# EAGLE board Laboratory 2_ Part 1 – Build a 4-bit Adder_Subtractor (EAGLE 7.6.0)

Size 56.82 x 53.33 mm. Coordinates in mm from the lower left corner, seen from the top.
Outline: 0,0 56.82,0 56.82,53.33 0,53.33 0,0
Copper layers (1*16): Top 0.035mm / dielectric 1.5mm / Bottom 0.035mm
Design rules "default": minimum track width 10mil, minimum drill 24mil, track to track 8mil, track to pad 8mil, pad to pad 8mil, via to via 8mil, smd to smd 8mil, copper to edge 40mil, drill to drill 8mil, minimum pad ring 10mil, minimum via ring 8mil, stop-mask expansion 4mil, vias tented up to drill 0mil, thermal gap 10mil

## Footprints (pad centres in the part's own frame; a part is rotated, then mirrored left to right if it is on the bottom)
LED5MM = drill 0.813 octagon: A -1.27,0; K 1.27,0
2P-2.54-65/35MIL = drill 0.889 pad 1.651 square: 1 0,1.27 | drill 0.889 pad 1.651: 2 0,-1.27
0207/10 = drill 0.813 octagon: 1 -5.08,0; 2 5.08,0
M251 = drill 0.813 long: 1 -2.54,0; 2 0,0; 3 2.54,0
DIL14 = drill 0.813 long: 1 -7.62,-3.81; 2 -5.08,-3.81; 3 -2.54,-3.81; 4 0,-3.81; 5 2.54,-3.81; 6 5.08,-3.81; 7 7.62,-3.81; 8 7.62,3.81; 9 5.08,3.81; 10 2.54,3.81; 11 0,3.81; 12 -2.54,3.81; 13 -5.08,3.81; 14 -7.62,3.81

## Placement (x,y rotation side)
D1  [LED5MM]  5,35.48 0 top
D2  [LED5MM]  5,48.18 0 top
D3  [LED5MM]  5,60.88 0 top  (outside the outline)
D4  [LED5MM]  5,73.58 0 top  (outside the outline)
D5  [LED5MM]  5,86.28 0 top  (outside the outline)
P1  5V  [2P-2.54-65/35MIL]  5,10.08 0 top
R1  330‎Ω  [0207/10]  5,213.28 0 top  (outside the outline)
R2  330‎Ω  [0207/10]  5,225.98 0 top  (outside the outline)
R3  330‎Ω  [0207/10]  5,238.68 0 top  (outside the outline)
R4  330‎Ω  [0207/10]  5,251.38 0 top  (outside the outline)
R5  330‎Ω  [0207/10]  5,264.08 0 top  (outside the outline)
S1  [M251]  5,98.98 0 top  (outside the outline)
S2  [M251]  5,111.68 0 top  (outside the outline)
S3  [M251]  5,124.38 0 top  (outside the outline)
S4  [M251]  5,137.08 0 top  (outside the outline)
S5  [M251]  5,149.78 0 top  (outside the outline)
S6  [M251]  5,162.48 0 top  (outside the outline)
S7  [M251]  5,175.18 0 top  (outside the outline)
S8  [M251]  5,187.88 0 top  (outside the outline)
S9  [M251]  5,200.58 0 top  (outside the outline)
U1  [DIL14]  5,22.78 0 top

## Library data of the parts
D1-D5 P1 R1-R5 S1-S9 U1 = AUTODESK_CIRCUITS_BREADBOARD

## Nets
N$1: P1.1 R1.1 R2.1 R3.1 R4.1 R5.1 S1.1 S2.1 S3.1 S4.1 S5.1 S6.1 S7.1 S8.1 S9.1 U1.7
N$2: U1.6
N$3: U1.8
N$4: U1.11
N$5: U1.3
N$6: P1.2 S1.3 S2.3 S3.3 S4.3 S5.3 S6.3 S7.3 S8.3 S9.3 U1.14
N$7: D2.A
N$8: D1.A
N$9: D3.A
N$10: D4.A
N$11: D5.A
N$12: D1.K R1.2
N$13: D2.K R2.2
N$14: D3.K R3.2
N$15: D4.K R4.2
N$16: D5.K R5.2
N$17: S5.2
N$18: S8.2 U1.10
N$19: S4.2 U1.2
N$20: S7.2
N$21: S6.2 U1.5
N$22: S9.2
N$23: S3.2
N$24: S2.2 U1.13
N$25: S1.2 U1.1 U1.4 U1.9 U1.12

## Tracks (layer width: path | path; a pad name or v marks a point on that pad's centre or on a via)
N$1  (15 unrouted)
N$6  (10 unrouted)
N$12  (1 unrouted)
N$13  (1 unrouted)
N$14  (1 unrouted)
N$15  (1 unrouted)
N$16  (1 unrouted)
N$18  (1 unrouted)
N$19  (1 unrouted)
N$21  (1 unrouted)
N$24  (1 unrouted)
N$25  (4 unrouted)